# Altium PCB TinyArduinoPCB.PcbDoc
Units mil, origin at the board's own origin, x right, y up, seen from the top; angles counter-clockwise.
Board outline 400 x 400 mil, 4 copper layers (Top Layer, Signal Layer 1, Signal Layer 2, Bottom Layer), stack 115.319 mil thick; 13 components, 11 nets, 43 pads, 21 vias.
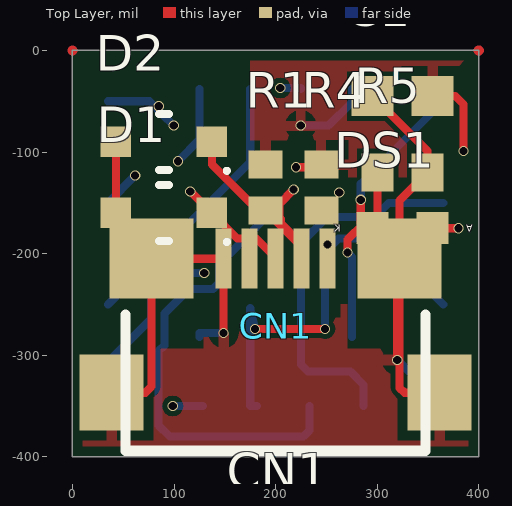
[diagram p0: Top Layer view]
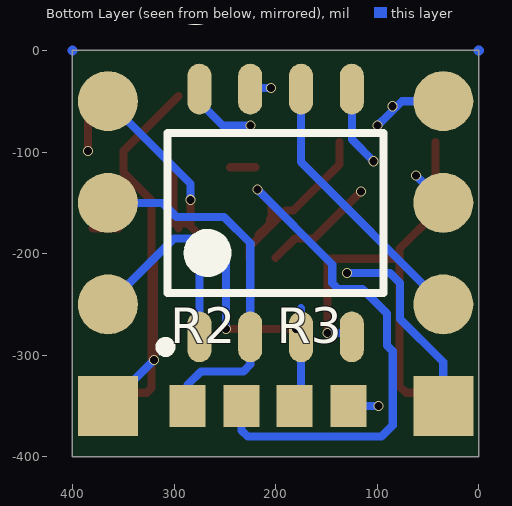
[diagram p1: Bottom Layer view, seen from below]
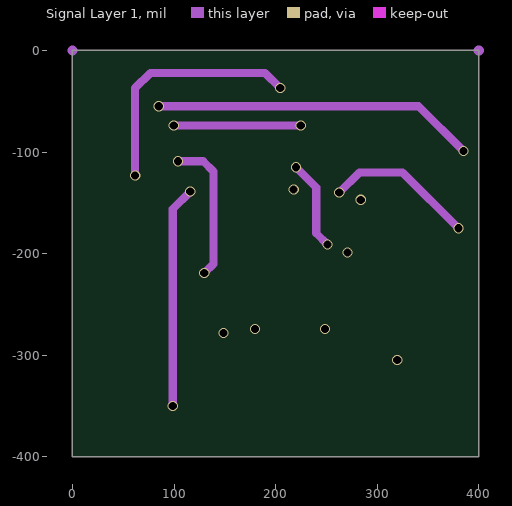
[diagram p2: Signal Layer 1]

## Layer stack, top to bottom
Top Solder: solder mask 1, Solder Resist, Dk 3.5
Top Layer: signal copper 1.4
Dielectric 1: core 45, FR-4, Dk 4.6
Signal Layer 1: signal copper 1.417
Dielectric 3: prepreg 19.685, Dk 4.2
Signal Layer 2: signal copper 1.417
Dielectric 2: core 45, Dk 4.2
Bottom Layer: signal copper 1.4
Bottom Solder: solder mask 1, Solder Resist, Dk 3.5

## Board outline
0,-400 200,-400 400,-400 400,-200 400,0 0,0

## Design rules (kind name [scope] priority, off if disabled: settings)
AssemblyTestPointUsage AssemblyTestPointUsage_1 [All] p2:
AssemblyTestpoint AssemblyTestpoint_1 [All] p2: testpointundercomponent=TRUE minsize=40 maxsize=100 preferedsize=60 minholesize=0 maxholesize=40 preferedholesize=32 testpointgrid=1 usegrid=TRUE gridtolerance=0.01 allowsidetop=TRUE allowsidebottom=TRUE
Clearance [All] p1: gap=10 ignorepadtopadclearanceinfootprint=FALSE except(0: Arc-Hole Track-Hole SMDPad-Hole THPad-Hole Via-Hole Fill-Hole Poly-Hole Region-Hole Text-Hole)
Clearance Clearance_1 [All] p2: gap=5 ignorepadtopadclearanceinfootprint=FALSE except(0: Arc-Hole Track-Hole SMDPad-Hole THPad-Hole Via-Hole Fill-Hole Poly-Hole Region-Hole Text-Hole)
ComponentClearance ComponentClearance_1 [All] p2: gap=10 collisioncheckmode=3 verticalgap=10 showdistances=FALSE
DiffPairsRouting DiffPairsRouting_1 [All] p2: maxlimit=10 minlimit=10 mostfreqgap=10 toplayer_minwidth=15 toplayer_maxwidth=15 toplayer_prefwidth=15 midlayer1_minwidth=15 midlayer1_maxwidth=15 midlayer1_prefwidth=15 midlayer2_minwidth=15 midlayer2_maxwidth=15 midlayer2_prefwidth=15 bottomlayer_minwidth=15 bottomlayer_maxwidth=15 bottomlayer_prefwidth=15 maxuncoupledlength=500
FabricationTestPointUsage FabricationTestPointUsage_1 [All] p2: valid=0 allowmultiple=FALSE
FabricationTestpoint FabricationTestpoint_1 [All] p2: side=3 testpointundercomponent=TRUE minsize=40 maxsize=100 preferedsize=60 minholesize=0 maxholesize=40 preferedholesize=32 testpointgrid=1 allowsidetop=TRUE allowsidebottom=TRUE usegrid=TRUE gridtolerance=0.01
FanoutControl Fanout_LCC [IsLCC] p1: bgadir=Out bgaviamode=Centered fanoutstyle=Auto fanoutdirection=Alternating viagrid=1 // Fanout_LCC (Default Rule)
FanoutControl Fanout_BGA [IsBGA] p2: bgadir=Out bgaviamode=Centered fanoutstyle=Auto fanoutdirection=Alternating viagrid=1 // Fanout_BGA (Default Rule)
FanoutControl Fanout_Small [(CompPinCount < 5)] p3: bgadir=Out bgaviamode=Centered fanoutstyle=Auto fanoutdirection=OutThenIn viagrid=1 // Fanout_Small (Default Rule)
FanoutControl Fanout_SOIC [IsSOIC] p4: bgadir=Out bgaviamode=Centered fanoutstyle=Auto fanoutdirection=Alternating viagrid=1 // Fanout_SOIC (Default Rule)
FanoutControl Fanout_BGA_1 [IsBGA] p6: bgadir=Out bgaviamode=Centered fanoutstyle=Auto fanoutdirection=Alternating viagrid=1 // Fanout_BGA (Default Rule)
FanoutControl Fanout_LCC_1 [IsLCC] p7: bgadir=Out bgaviamode=Centered fanoutstyle=Auto fanoutdirection=Alternating viagrid=1 // Fanout_LCC (Default Rule)
FanoutControl Fanout_SOIC_1 [IsSOIC] p8: bgadir=Out bgaviamode=Centered fanoutstyle=Auto fanoutdirection=Alternating viagrid=1 // Fanout_SOIC (Default Rule)
FanoutControl Fanout_Small_1 [(CompPinCount < 5)] p9: bgadir=Out bgaviamode=Centered fanoutstyle=Auto fanoutdirection=OutThenIn viagrid=1 // Fanout_Small (Default Rule)
FanoutControl Fanout_Default_1 [All] p10: bgadir=Out bgaviamode=Centered fanoutstyle=Auto fanoutdirection=Alternating viagrid=1 // Fanout_Default (Default Rule)
Height Height_1 [All] p2: minheight=0 maxheight=1000 prefheight=500
HoleSize HoleSize_1 [All] p2: absolutevalues=TRUE maxlimit=100 minlimit=1 maxpercent=80.000 minpercent=20.000
HoleToHoleClearance HoleToHoleClearance_1 [All] p2: gap=10 allowstackedmicrovias=TRUE
LayerPairs LayerPairs_1 [All] p2: enforce=TRUE
MinimumSolderMaskSliver MinimumSolderMaskSliver_1 [All] p2: minsoldermaskwidth=10
NetAntennae NetAntennae_1 [All] p2: netantennaetolerance=0
PasteMaskExpansion PasteMaskExpansion_1 [All] p2: expansion=0
PlaneClearance PlaneClearance_1 [All] p2: clearance=20
PlaneConnect PlaneConnect_1 [All] p2: planeconnectstyle=Relief reliefexpansion=20 reliefentries=4 reliefconductorwidth=10 reliefairgap=10
PolygonConnect [All] p1: connectstyle=Relief reliefconductorwidth=10 reliefentries=4 polygonreliefangle="90 Angle" airgapwidth=10
PolygonConnect PolygonConnect_1 [All] p2: connectstyle=Relief reliefconductorwidth=10 reliefentries=4 polygonreliefangle="90 Angle" airgapwidth=10
RoutingCorners RoutingCorners_1 [All] p2: cornerstyle=45-Degree minsetback=100 maxsetback=100
RoutingLayers RoutingLayers_1 [All] p2: top layer_v5=TRUE mid layer 1_v5=TRUE mid layer 2_v5=TRUE bottom layer_v5=TRUE
RoutingPriority RoutingPriority_1 [All] p2: routingpriority=0
RoutingTopology RoutingTopology_1 [All] p2: topology=Shortest
RoutingVias [All] p1: holewidth=28 width=50 viastyle="Through Hole" minholewidth=28 minwidth=50 maxholewidth=28 maxwidth=50
RoutingVias RoutingVias_1 [All] p2: holewidth=8 width=10 viastyle="Through Hole" minholewidth=6 minwidth=10 maxholewidth=10 maxwidth=20
ShortCircuit ShortCircuit_1 [All] p2: allowed=FALSE
SilkToBoardRegionClearance SilkToBoardRegionClearance_1 [All] p2:
SilkToSilkClearance SilkToSilkClearance_1 [All] p2: silktosilkclearance=10
SilkToSolderMaskClearance SilkToSolderMaskClearance_1 [IsPad] p2: minsilkscreentomaskgap=10 clearancetoexposedcopper=TRUE
SolderMaskExpansion [All] p1: expansion=4
SolderMaskExpansion SolderMaskExpansion_1 [All] p2: expansion=4
UnRoutedNet UnRoutedNet_1 [All] p2:
UnpouredPolygon UnpouredPolygon_1 [All] p2:
Width [All] p1: maxlimit=10 minlimit=10 preferedwidth=10
Width Width_1 [All] p2: maxlimit=10 minlimit=5 preferedwidth=8
26 further rules are at their usual default settings.

## Classes and differential pairs
component class TinyArduino: C1 CN1 D1 D2 DS1 J2 R1 R2 R3 R4 R5 U1

## Components (designator, comment, footprint, x,y, rotation, side; value= is the part's Value field where it differs from the comment)
C1 "AVX Interconnect / Elco 0603YC104JAT2A" CAPC1608X90X35NL15T15 325,-45 r0 top
CN1 "Hirose ZX62R-B-5P" PCB-kuo5gykd7jvbo0o0jro3-1 200,-205 r0 top
D1 "Diodes Inc. B0540WS-7" PCB-6tqbiewd2diqb4h5r69p-1 90,-160 r180 top
D2 "Diodes Inc. B0540WS-7" PCB-6tqbiewd2diqb4h5r69p-1 90,-90 r180 top
DS1 "Avago HSMG-C190" AVAG-HSMX-C190 325,-175 r180 top
J1 "Molex 90120-0764" PCB-mruwntkvy73mrw75dg9m-1 35,-350 r90 bottom
J2 "Molex 90120-0764" PCB-mruwntkvy73mrw75dg9m-1 365,-350 r90 bottom
R1 "Vishay Dale CRCW06031K50FKEA" RESC1609X50X30LL10T20 190,-135 r90 top
R2 "Vishay Dale CRCW060368R0JNEA" RESC1609X50X30ML10T20 260,-350 r0 bottom
R3 "Vishay Dale CRCW060368R0JNEA" RESC1609X50X30ML10T20 155,-350 r0 bottom
R4 "Vishay Dale CRCW0603390RFKEA" RESC1609X50X30LL10T20 245,-135 r270 top
R5 "Vishay CRCW06030000Z0EA" RESC1609X50X30NL10T20 325,-120 r0 top
U1 "ATtiny85-20SU" 8S2_L 200,-160 r90 bottom

## Footprints (in the part's own frame and the unit in brackets; to place one, negate y for a bottom-side part, rotate by r counter-clockwise, add the part's x,y. Pads: shape width x height; smd on the part's side, far side on the other; paste and mask are expansions set on the pad)
8S2_L [mm] "SOP, 8-Leads, Body 5.3x5.3mm, Pitch 1.27mm, IPC High Density"
  oval 1.27x0.6 smd: 1(-3.096,1.905) 2(-3.096,0.635) 3(-3.096,-0.635) 4(-3.096,-1.905) 5(3.096,-1.905) 6(3.096,-0.635) 7(3.096,0.635) 8(3.096,1.905)
  silkscreen extent -3.47,-2.7 2,2.88, body extent -2.7,-2.68 2.7,2.68, height 2.16
AVAG-HSMX-C190 [mm] "AVAG-HSMX-C190"
  rect 0.8x0.8 smd: 1(-0.75,0) 2(0.75,0)
  body extent -0.85,-0.45 0.85,0.45, height 0.9
CAPC1608X90X35NL15T15 [mm] "CAPC1608X90X35NL15T15"
  rect 1.05x1 smd: 1(-0.75,0) 2(0.75,0)
  body extent -0.8,-0.4 0.8,0.4, height 0.55
PCB-6tqbiewd2diqb4h5r69p-1 [mil] "DIOD-1N4148WS-SOD-323-2"
  rect 30x30 smd: 1(-47.24,0) 2(47.24,0)
  silkscreen extent -64,-28 5,31, body extent -35,-28 35,28, height 47
PCB-kuo5gykd7jvbo0o0jro3-1 [mm] "Footprint - Hirose Electric (HRS) HISZX62RB5P"
  rect 0.4x1.5 smd: 1(1.3,0) 2(0.65,0) 3(0,0) 4(-0.65,0) 5(-1.3,0)
  rect 2.1x2 smd: 6(-3.1,0) 9(3.1,0)
  rect 1.6x1.9 smd: 7(-4.1,-3.35) 8(4.1,-3.35)
  silkscreen extent -3.75,-4.8 3.75,-1.4, body extent -4.4,-6.33 4.4,-0.6, height 2.71
PCB-mruwntkvy73mrw75dg9m-1 [mm]
  rect 1.5x1.5 smd: 1(0,0)
  round 1.5 smd: 2(2.54,0) 3(5.08,0) 4(7.62,0)
  body extent -1.27,-1.25 8.89,1.25, height 9.25
RESC1609X50X30LL10T20 [mm] "RESC1609X50X30LL10T20"
  rect 0.7x0.85 smd: 1(-0.575,0) 2(0.575,0)
  body extent -0.82,-0.48 0.82,0.48, height 0.5
RESC1609X50X30ML10T20 [mm] "RESC1609X50X30ML10T20"
  rect 0.9x1.05 smd: 1(-0.675,0) 2(0.675,0)
  body extent -0.82,-0.48 0.82,0.48, height 0.5
RESC1609X50X30NL10T20 [mm] "RESC1609X50X30NL10T20"
  rect 0.8x0.95 smd: 1(-0.625,0) 2(0.625,0)
  body extent -0.82,-0.48 0.82,0.48, height 0.5

## Part data
C1: library part CMP-19299424-3, "CAP CER 0.1UF 16V 5% X7R 0603"
CN1: library part ZX62R-B-5P, "copper, gold, series, pos, Connectors and Adapters, Wire to Board, pitch, solder, receptacle, conn, connector, rows, ..."
D1 D2: library part CMP-992e5020441546e9-1, "B0540WS Series 40 V 0.5 A Schottky Barrier Rectifier Surface Mount - SOD-323"
DS1: library part HSMG-C190, "LED 570NM GREEN DIFF 0603 SMD"
J1 J2: library part 90120-0764, "2.54mm (.100\") Pitch C-Grid III? Header, Single Row, Vertical, 3 Circuits, 0.38µm (15µ\") Gold (Au) Selective Plating"
R1: library part CMP-1857175-2, "RES SMD 1.5K OHM 1% 1/10W 0603"
R2 R3: library part CMP-1866767-2, "RES SMD 68 OHM 5% 1/10W 0603"
R4: library part CMP-3855866-2, "RES SMD 390 OHM 1% 1/10W 0603"
R5: library part CMP-1855984-6, "Resistor; Thick Film; 0 Ohms; 0.1 W; 0 Ohms Jumper; SMT; 0603; TCR 0 ppm/DegC; TR"
U1: library part ATTINY85-20SU, "8-bit AVR Microcontroller, 20MHz, 2.7-5.5V, 8K Flash, 512 Bytes EEPROM, 512 Bytes SRAM, Industrial Grade (-40°C to 85°C), 8-Lead SOIC, Pb-Free"

## Via types
v1: diameter 10, hole 8, Top Layer to Bottom Layer, 17 vias
v2: diameter 10, hole 8, Top Layer to Signal Layer 1, 4 vias

## Nets (pads, with @x,y where several pads share a name; then routed paths per layer and width w, separated by ;. In a path a pad name is that pad's centre, name@x,y a point inside that pad or via, vN(x,y) a via of type N, cw(c..) or ccw(c..) an arc to the next point about the centre after c; other vN are vias at no path point)
+5V: C1.2 CN1.1 J1.4 R1.2 R4.1 U1.8 | length 798
  Top Layer w8: v2(220,-115) R4.1@245,-114.98 ; CN1.1 v2(251.18,-191.18) ; C1.2 376.77,-45 384.77,-53 v1(384.77,-99.06)
  Signal Layer 1 w8: v1(85,-55) 340.72,-55 v1(384.77,-99.06) ; v1(99.77,-74.06) v1(224.77,-74.06) ; v2(220,-115) 240,-135 240,-180 v2(251.18,-191.18)
  Bottom Layer w8: J1.4 75.72,-50 88.66,-62.95 v1(99.77,-74.06) ; v1(224.77,-74.06) 252,-74.06 275,-51.06 U1.8
\R\E\S\E\T\: DS1.2 J2.4 R5.1 U1.1 | length 345.5
  Top Layer w8: v1(270.77,-199.06) 270.77,-186.08 DS1.2@286.77,-170.08 ; v1(283.77,-147.06) 283.77,-170.08 DS1.2@286.77,-170.08 ; DS1.2 DS1.2@295.47,-170.08 ; R5.1 300.39,-170.08 DS1.2@295.47,-170.08 ; DS1.2@286.77,-170.08 DS1.2@295.47,-170.08
  Bottom Layer w8: v1(270.77,-199.06) 275,-203.28 U1.1 ; v1(283.77,-147.06) 283.77,-131.23 J2.4
GND: C1.1 CN1.5 CN1.6 CN1.7 CN1.8 CN1.9 D1.2 D2.2 J2.1 R5.2 U1.4 | length 997.1
  Top Layer w8: CN1.7 71.77,-336.89 77.95,-330.71 CN1.6 ; D2.2 D1.2 77.95,-195.2 CN1.6 ; v1(148.82,-278.06) CN1.5 CN1.6 ; C1.1 349.61,-99.13 R5.2 322.05,-147.56 CN1.9 ; v1(319.77,-304.77) 319.77,-205 CN1.9 ; CN1.8 326.77,-336.89 322.05,-332.17 CN1.9
  Bottom Layer w8: U1.4 125,-278.06 v1(148.82,-278.06) ; v1(319.77,-304.77) J2.1
NetCN1_2: CN1.2 D2.1 R1.1 R2.1 | length 708.6
  Top Layer w8: D2.1 137.24,-112.24 182.64,-157.64 R1.1 CN1.2@225.59,-193.23 ; v1(217.77,-137.06) 203.77,-151.06 203.77,-164.56 205.27,-166.06 205.27,-171.64 206.77,-171.64 216.88,-181.74 216.88,-184.34 225.59,-193.06 CN1.2@225.59,-193.23 ; CN1.2 CN1.2@225.59,-193.23
  Bottom Layer w8: v1(217.77,-137.06) 144.22,-210.61 144.22,-229.06 138.39,-234.89 114.62,-234.89 90.46,-259.06 90.46,-290.34 84.77,-296.02 84.77,-369.06 95.77,-380.06 227.43,-380.06 233.43,-374.06 R2.1
NetCN1_3: CN1.3 D1.1 R3.1 | length 359
  Top Layer w8: v1(116.04,-138.79) D1.1 162.24,-185 180.92,-185 CN1.3@200,-204.08
  Signal Layer 1 w8: v1(98.77,-350) 98.77,-156.06 v1(116.04,-138.79)
  Bottom Layer w8: v1(98.77,-350) R3.1
NetDS1_1: DS1.1 R4.2 | length 173.9
  Top Layer w8: DS1.1 v2(380,-175)
  Signal Layer 1 w8: v2(262.64,-140) 282.64,-120 325,-120 v2(380,-175)
PB0: J1.1 U1.5 | length 417.6
  Signal Layer 1 w8: v1(103.77,-109.06) 128.77,-109.06 138.77,-119.06 138.77,-210.06 v1(129.77,-219.06)
  Bottom Layer w8: J1.1 35,-306.83 77.46,-264.37 77.46,-229.06 87.46,-219.06 v1(129.77,-219.06) ; v1(103.77,-109.06) 125,-87.83 U1.5
PB1: J1.2 U1.6 | length 269.9
  Bottom Layer w8: J1.2 175,-110 U1.6
PB2: J1.3 U1.7 | length 300.7
  Signal Layer 1 w8: v1(61.77,-123.23) 61.77,-37.06 76.77,-22.06 189.54,-22.06 v1(204.54,-37.06)
  Bottom Layer w8: J1.3 v1(61.77,-123.23) ; v1(204.54,-37.06) 225,-37.06 U1.7
PB3: J2.3 R2.2 U1.2 | length 366.8
  Bottom Layer w8: R2.2 286.57,-329.06 273.57,-316.06 231.77,-316.06 225,-309.28 U1.2 225,-189.62 250.8,-163.82 297.53,-163.82 311.35,-150 J2.3
PB4: J2.2 R3.2 U1.3 | length 417
  Top Layer w8: v1(179.77,-274.06) v1(248.77,-274.06)
  Bottom Layer w8: v1(179.77,-274.06) 175,-253.83 U1.3 175,-350 R3.2 ; v1(248.77,-274.06) 248.77,-198.06 261.77,-185.06 300.06,-185.06 J2.2
pads on no net: CN1.4

## Polygon pours and split planes (outlines as drawn)
+5V on Top Layer "+5V" (solid, pour order 7): 400,-125 400,0 280,0 175,0 175,-125
GND on Top Layer "GND" (solid, pour order 11): 400,-400 400,-250 0,-250 0,-400 400,-400

## Other copper
Multi-Layer:
  lines w10: 0,0 0,0 ; 400,0 400,0

## Text inside footprints (layer, text, board x,y; h text height)
DS1: Top Overlay "A" at 393.89,-169.09 h11.81 r180; Top Overlay "K" at 263.98,-180.91 h11.81